# EAGLE board JetRacer4AntennasSupport_partsRev1_WIDE (EAGLE 9.6.0)

Size 171.88 x 32.4 mm. Coordinates in mm from the lower left corner, seen from the top.
Outline: 21.81,26.97 arc90 18.46,30.37 arc59 15.81,28.87 15.81,25.07 arc59 18.46,23.62 arc90 21.81,26.97
Outline: 22.14,31.2 51.84,17 120.04,17 149.74,31.2 151.74,32.2 arc-5 152.44,32.4 169.04,32.4 arc-59 170.74,31.5 arc-16 171.54,30.1 171.84,28 arc-27 171.44,24.7 arc-6 171.04,23.9 arc-13 168.14,21.5 154.34,21.5 127.44,0 44.44,0 17.54,21.5 3.74,21.5 arc-13 0.84,23.9 arc-6 0.44,24.7 arc-27 0.04,28 0.34,30.1 arc-16 1.14,31.5 arc-59 2.84,32.4 19.44,32.4 arc-5 20.14,32.2 22.14,31.2
Outline: 8.81,26.97 arc90 5.46,30.37 arc59 2.81,28.87 2.81,25.07 arc59 5.46,23.62 arc90 8.81,26.97
Outline: 150.07,26.97 arc-90 153.42,30.37 arc-59 156.07,28.87 156.07,25.07 arc-59 153.42,23.62 arc-90 150.07,26.97
Outline: 163.07,26.97 arc-90 166.42,30.37 arc-59 169.07,28.87 169.07,25.07 arc-59 166.42,23.62 arc-90 163.07,26.97
Copper layers (1*16): Top 0.035mm / dielectric 1.5mm / Bottom 0.035mm
Design rules "SeeedStudio_2layer_DRU_no_angle_20140221": minimum track width 6mil, minimum drill 12mil, track to track 6mil, track to pad 6mil, pad to pad 6mil, via to via 6mil, smd to smd 0mil, copper to edge 10mil, drill to drill 10mil, minimum pad ring 10mil, minimum via ring 6mil, stop-mask expansion 2mil, vias tented up to drill 100mil, thermal gap 10mil
Holes 3.6 mm at 63.94,3.5 63.94,13.5 107.94,3.5 107.94,13.5

## Placement (x,y rotation side)
E$1  [LOGO_FABO_L]  85.78,5.73 0 top

## Library data of the parts
E$1 = FaBo-Logo

## Text on the board
tPlace: JR-4AS | Rev1 | TOP
bPlace: BOTTOM | JR-4AS
tDocu: UPPER PANEL LINE | 長径 6.7mm / 短径 5.7mm *4 | Φ3.6mm*4 | JETSON NANO LINE | JETSON NANO SPECER | JetRacer4AntennasSupport_partsRev1
bDocu: UPPER PANEL LINE | 長径 6.7mm / 短径 5.7mm *4 | Φ3.6mm*4